# EAGLE board fit-test (EAGLE 9.1.0)

Size 170 x 22.21 mm. Coordinates in mm from the lower left corner, seen from the top.
Outline: 170,0 170,22.21 24,22.21 23.95,22.21 15.95,22.21 13.37,22.21 12.05,22.21 0,22.21 0,0 123.89,0 153.03,0 170,0
Copper layers (1*16): Top 0.035mm / dielectric 60mil / Bottom 0.035mm
Design rules "seed-4layer-6.6 *": minimum track width 6mil, minimum drill 0.3mm, track to track 6mil, track to pad 6mil, pad to pad 6mil, via to via 6mil, smd to smd 0mil, copper to edge 12mil, drill to drill 12mil, minimum pad ring 6mil, minimum via ring 5.5mil, stop-mask expansion 4mil, vias tented up to drill 25mil, thermal gap 10mil
Net classes: 1 Power: width 0.305 mm, drill 0.203 mm; 2 Slot-power: width 0.508 mm; 3 tx100: width 0.254 mm, clearance 0.457 mm; 4 usb90: width 0.508 mm, clearance 0.61 mm

## Footprints (pad centres in the part's own frame; a part is rotated, then mirrored left to right if it is on the bottom)
3,2 = hole 3.2: 0,0
PJ-102A = drill 3 pad 4.8: RING 0.1,-3.39; RING_SW -4.6,-6.29; TIP 0.1,-9.29
DB9 = drill 1.016 pad 1.88 square: 1 -5.54,-1.42 | drill 1.016 pad 1.88: 2 -2.77,-1.42; 3 0,-1.42; 4 2.77,-1.42; 5 5.54,-1.42; 6 -4.15,1.42; 7 -1.38,1.42; 8 1.38,1.42; 9 4.15,1.42 | drill 3.302 pad 5.08: G1 -12.5,0; G2 12.5,0
A8_CART = drill 0.508 pad 1.27: P1 -17.78,6.35; P2 -15.24,6.35; P3 -12.7,6.35; P4 -10.16,6.35; P5 -7.62,6.35; P6 -5.08,6.35; P7 -2.54,6.35; P8 0,6.35; P9 2.54,6.35; P10 5.08,6.35; P11 7.62,6.35; P12 10.16,6.35; P13 12.7,6.35; P14 15.24,6.35; P15 17.78,6.35; PA -17.78,10.16; PB -15.24,10.16; PC -12.7,10.16; PD -10.16,10.16; PE -7.62,10.16; PF -5.08,10.16; PH -2.54,10.16; PJ 0,10.16; PK 2.54,10.16; PL 5.08,10.16; PM 7.62,10.16; PN 10.16,10.16; PP 12.7,10.16; PR 15.24,10.16; PS 17.78,10.16
71430-0101 = drill 1.2 pad 2.25: GND1 -15.46,6.425; GND2 16.89,6.45 | drill 1.75: GND3 21.67,3.82; GND4 -20.23,3.82 | drill 0.65 pad 1: P1 13.72,8.7; P2 12.92,7.55; P3 12.12,8.7; P4 11.32,7.55; P5 10.52,8.7; P6 9.72,7.55; P7 8.92,8.7; P8 8.12,7.55; P9 7.32,8.7; P10 6.52,7.55; P11 5.72,8.7; P12 4.92,7.55; P13 4.12,8.7; P14 3.32,7.55; P15 2.52,8.7; P16 1.72,7.55; P17 0.92,8.7; P18 0.12,7.55; P19 -0.68,8.7; P20 -1.48,7.55; P21 -2.28,8.7; P22 -3.08,7.55; P23 -3.88,8.7; P24 -4.68,7.55; P25 -5.48,8.7; P26 -6.28,7.55; P27 -7.08,8.7; P28 -7.88,7.55; P29 -8.68,8.7; P30 -9.48,7.55; P31 -10.28,8.7; P32 -11.08,7.55; P33 -11.88,8.7; P34 -12.68,7.55; P35 14.12,6.35; P36 13.32,5.1; P37 12.52,6.35; P38 11.72,5.1; P39 10.92,6.35; P40 10.12,5.1; P41 9.32,6.35; P42 8.52,5.1; P43 7.72,6.35; P44 6.92,5.1; P45 6.12,6.35; P46 5.32,5.1; P47 4.52,6.35; P48 3.72,5.1; P49 2.92,6.35; P50 2.12,5.1; P51 1.32,6.35; P52 0.52,5.1; P53 -0.28,6.35; P54 -1.08,5.1; P55 -1.88,6.35; P56 -2.68,5.1; P57 -3.48,6.35; P58 -4.28,5.1; P59 -5.08,6.35; P60 -5.88,5.1; P61 -6.68,6.35; P62 -7.48,5.1; P63 -8.28,6.35; P64 -9.08,5.1; P65 -9.88,6.35; P66 -10.68,5.1; P67 -11.48,6.35; P68 -12.28,5.1
MOLEX_480371000 = smd 1.2 x 2: 1 3.5,2.6; 2 1,2.6; 3 -1,2.6; 4 -3.5,2.6 | drill 2.5: M1 -5.7,0; M2 5.7,0 | hole 1.1: -2.25,0; 2.25,0

## Placement (x,y rotation side)
H1  MOUNT-HOLE3.2  [3,2]  48,4 0 top
H2  MOUNT-HOLE3.2  [3,2]  108,4 0 top
PJ-102AH  PJ-102AH  [PJ-102A]  162.56,0 180 top
SERIAL0  [DB9]  15.88,9.84 180 top
U$2  A8_CART  [A8_CART]  78,0.12 0 top
VHDCI_CON  71430-0101  [71430-0101]  134.62,0.32 0 top
XIO_USB  USB-A  [MOLEX_480371000]  37.78,17.65 0 top

## Library data of the parts
H1 H2 = holes
PJ-102AH XIO_USB = adafruit
SERIAL0 = SparkFun
U$2 = sjg-con
VHDCI_CON = sjg-vhdci

## Nets
GND: XIO_USB.4
VBUS: XIO_USB.1

## Text on the board
Document: 1 : Signal / 2 : GND / 15 : +5v / +3.3v / 16 : Signal | 1mm max / len diff | TX:4mm / RX: 6mm